# Altium PCB SmartHaloDD.PcbDoc (part 1 of 2)
Units mil, origin at the board's own origin, x right, y up, seen from the top; angles counter-clockwise.
Board outline 2460.63 x 2460.63 mil, 2 copper layers (Top Layer, Bottom Layer), stack 62.8 mil thick; 142 components, 107 nets, 460 pads, 151 vias.
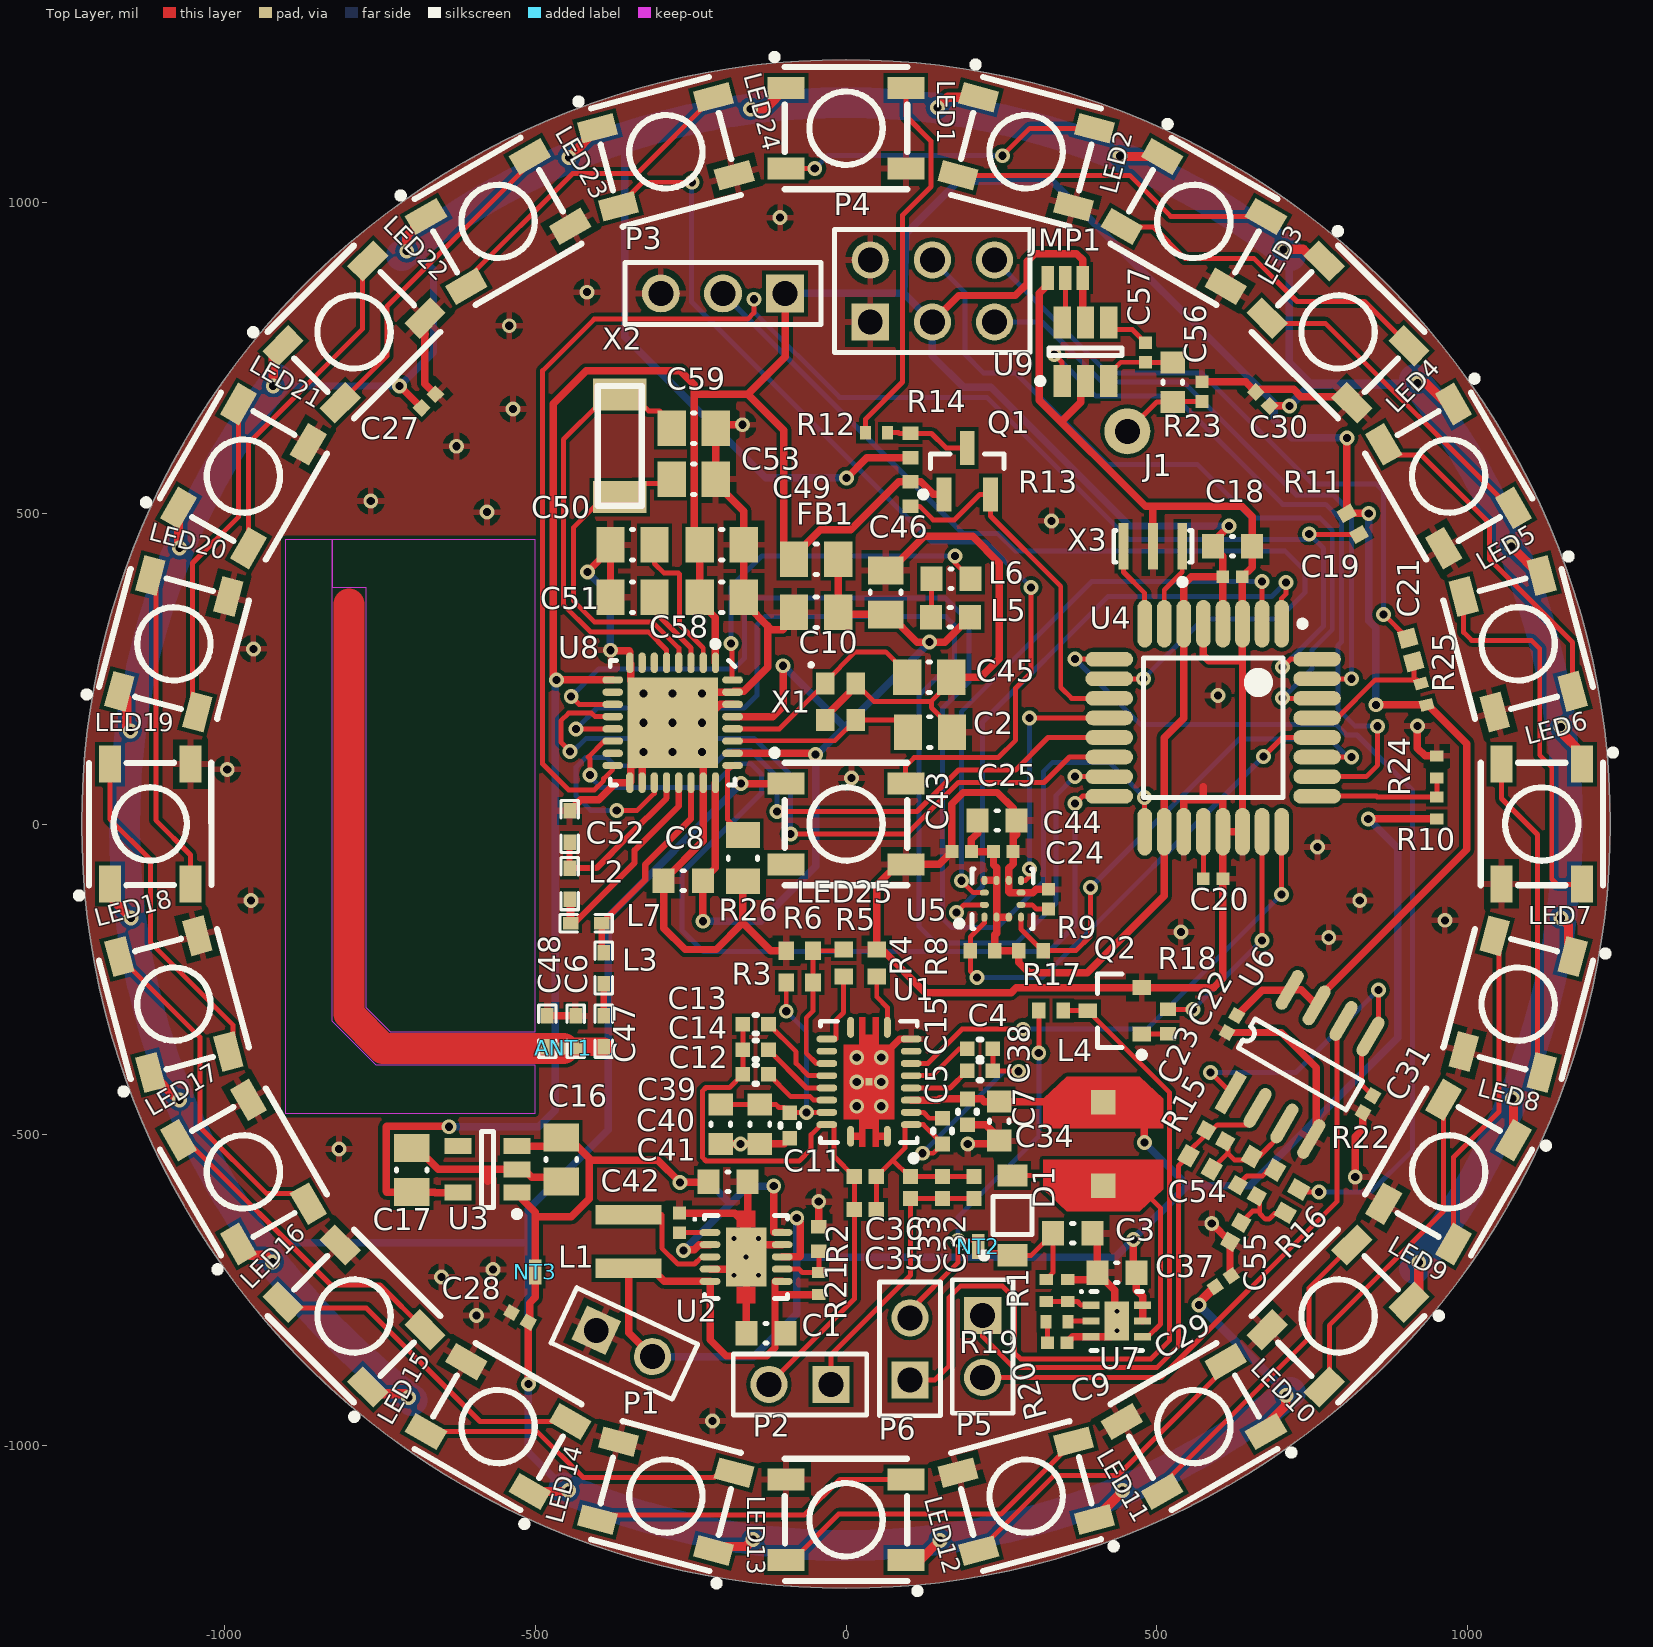
[diagram p0: Top Layer view]
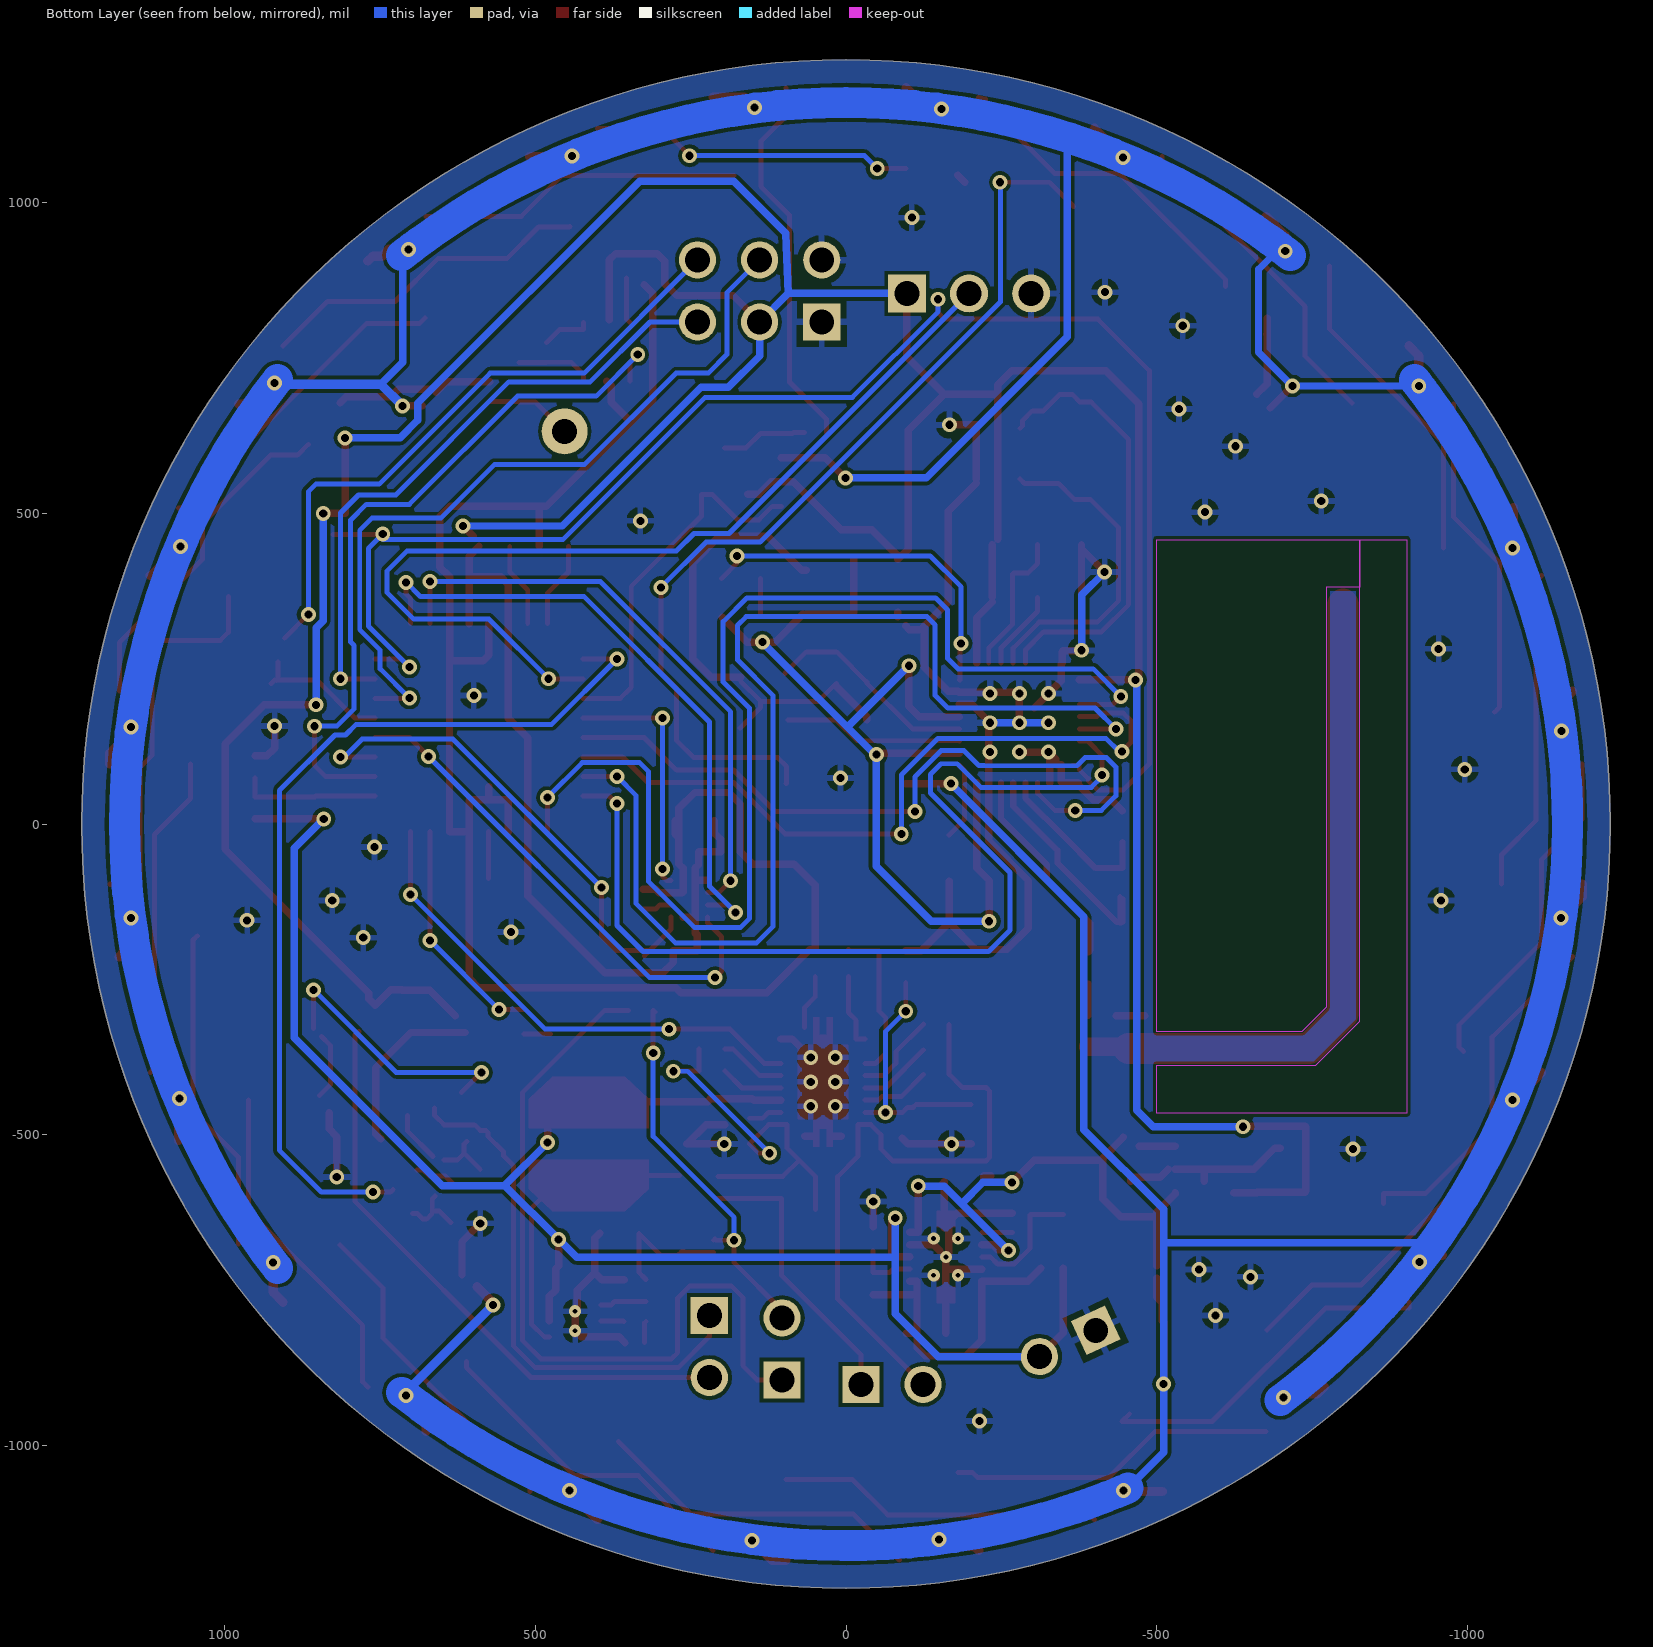
[diagram p1: Bottom Layer view, seen from below]

## Layer stack, top to bottom
Top Solder: solder mask 1, Solder Resist, Dk 3.5
Top Layer: signal copper 1.4
Dielectric 1: core 60, FR-4, Dk 4.2
Bottom Layer: signal copper 1.4
Bottom Solder: solder mask 1, Solder Resist, Dk 3.5

## Board outline
0,-1230.32 cw(c0,0) -1230.32,0 cw(c0,0) 0,1230.32 cw(c0,0) 1230.32,0 cw(c0,0)

## Design rules (kind name [scope] priority, off if disabled: settings)
AssemblyTestPointUsage AssemblyTestPointUsage_1 [All] p2:
AssemblyTestpoint AssemblyTestpoint_1 [All] p2: testpointundercomponent=TRUE minsize=40 maxsize=100 preferedsize=60 minholesize=0 maxholesize=40 preferedholesize=32 testpointgrid=1 usegrid=TRUE gridtolerance=0.01 allowsidetop=TRUE allowsidebottom=TRUE
Clearance [All] p1: gap=10
Clearance Clearance_ANT [InNet('NetANT1_1') vs OnLayer('Keep-Out Layer')] p2: gap=0 // Clearance Antenna (Keepout shouldn't apply to the antenna itself)
Clearance Clearance_1 [All] p3: gap=6
ComponentClearance ComponentClearance_1 [All] p2: gap=10 collisioncheckmode=3 verticalgap=10 showdistances=FALSE
DiffPairsRouting [All] p1: maxlimit=10 minlimit=10 mostfreqgap=10 toplayer_minwidth=15 toplayer_maxwidth=15 toplayer_prefwidth=15 bottomlayer_minwidth=15 bottomlayer_maxwidth=15 bottomlayer_prefwidth=15 maxuncoupledlength=500
DiffPairsRouting DiffPairsRouting_1 [All] p2: maxlimit=20 minlimit=6 mostfreqgap=8 toplayer_minwidth=6 toplayer_maxwidth=20 toplayer_prefwidth=8 bottomlayer_minwidth=6 bottomlayer_maxwidth=20 bottomlayer_prefwidth=8 maxuncoupledlength=500
FabricationTestPointUsage FabricationTestPointUsage_1 [All] p2: valid=0 allowmultiple=FALSE
FabricationTestpoint FabricationTestpoint_1 [All] p2: side=3 testpointundercomponent=TRUE minsize=40 maxsize=100 preferedsize=60 minholesize=0 maxholesize=40 preferedholesize=32 testpointgrid=1 allowsidetop=TRUE allowsidebottom=TRUE usegrid=TRUE gridtolerance=0.01
FanoutControl Fanout_LCC [IsLCC] p1: bgadir=Out bgaviamode=Centered fanoutstyle=Auto fanoutdirection=Alternating viagrid=1 // Fanout_LCC (Default Rule)
FanoutControl Fanout_BGA [IsBGA] p2: bgadir=Out bgaviamode=Centered fanoutstyle=Auto fanoutdirection=Alternating viagrid=1 // Fanout_BGA (Default Rule)
FanoutControl Fanout_Small [(CompPinCount < 5)] p3: bgadir=Out bgaviamode=Centered fanoutstyle=Auto fanoutdirection=OutThenIn viagrid=1 // Fanout_Small (Default Rule)
FanoutControl Fanout_SOIC [IsSOIC] p4: bgadir=Out bgaviamode=Centered fanoutstyle=Auto fanoutdirection=Alternating viagrid=1 // Fanout_SOIC (Default Rule)
FanoutControl Fanout_BGA_1 [IsBGA] p6: bgadir=Out bgaviamode=Centered fanoutstyle=Auto fanoutdirection=Alternating viagrid=1 // Fanout_BGA (Default Rule)
FanoutControl Fanout_LCC_1 [IsLCC] p7: bgadir=Out bgaviamode=Centered fanoutstyle=Auto fanoutdirection=Alternating viagrid=1 // Fanout_LCC (Default Rule)
FanoutControl Fanout_SOIC_1 [IsSOIC] p8: bgadir=Out bgaviamode=Centered fanoutstyle=Auto fanoutdirection=Alternating viagrid=1 // Fanout_SOIC (Default Rule)
FanoutControl Fanout_Small_1 [(CompPinCount < 5)] p9: bgadir=Out bgaviamode=Centered fanoutstyle=Auto fanoutdirection=OutThenIn viagrid=1 // Fanout_Small (Default Rule)
FanoutControl Fanout_Default_1 [All] p10: bgadir=Out bgaviamode=Centered fanoutstyle=Auto fanoutdirection=Alternating viagrid=1 // Fanout_Default (Default Rule)
Height Height_1 [All] p2: minheight=0 maxheight=118.11 prefheight=118.11
HoleSize HoleSize_1 [All] p2: absolutevalues=TRUE maxlimit=100 minlimit=1 maxpercent=80.000 minpercent=20.000
HoleToHoleClearance HoleToHoleClearance_1 [All] p2: gap=10 allowstackedmicrovias=TRUE
LayerPairs LayerPairs_1 [All] p2: enforce=TRUE
MinimumSolderMaskSliver MinimumSolderMaskSliver_1 [All] p2: minsoldermaskwidth=10
NetAntennae NetAntennae_1 [All] p2: netantennaetolerance=0
PasteMaskExpansion PasteMaskExpansion_1 [All] p2: expansion=0
PlaneClearance PlaneClearance_1 [All] p2: clearance=20
PlaneConnect PlaneConnect_1 [All] p2: planeconnectstyle=Relief reliefexpansion=20 reliefentries=4 reliefconductorwidth=10 reliefairgap=10
PolygonConnect [All] p1: connectstyle=Relief reliefconductorwidth=10 reliefentries=4 polygonreliefangle="90 Angle" airgapwidth=10
PolygonConnect PolygonConnect_1 [All] p2: connectstyle=Relief reliefconductorwidth=10 reliefentries=4 polygonreliefangle="90 Angle" airgapwidth=10
RoutingCorners RoutingCorners_1 [All] p2: cornerstyle=45-Degree minsetback=100 maxsetback=100
RoutingLayers RoutingLayers_1 [All] p2: top layer_v5=TRUE bottom layer_v5=TRUE
RoutingPriority RoutingPriority_1 [All] p2: routingpriority=0
RoutingTopology RoutingTopology_1 [All] p2: topology=Shortest
RoutingVias [All] p1: holewidth=28 width=50 viastyle="Through Hole" minholewidth=28 minwidth=50 maxholewidth=28 maxwidth=50
RoutingVias RoutingVias_1 [All] p2: holewidth=13 width=24 viastyle="Through Hole" minholewidth=13 minwidth=24 maxholewidth=28 maxwidth=50
ShortCircuit ShortCircuit_1 [All] p2: allowed=FALSE
SilkToBoardRegionClearance SilkToBoardRegionClearance_1 [All] p2:
SilkToSilkClearance SilkToSilkClearance_1 [All] p2: silktosilkclearance=10
SilkToSolderMaskClearance SilkToSolderMaskClearance_1 [IsPad] p2: minsilkscreentomaskgap=10 clearancetoexposedcopper=TRUE
SolderMaskExpansion [All] p1: expansion=4
SolderMaskExpansion SolderMaskExpansion_1 [All] p2: expansion=4
UnRoutedNet UnRoutedNet_1 [All] p2:
UnpouredPolygon UnpouredPolygon_1 [All] p2:
Width [All] p1: maxlimit=10 minlimit=10 preferedwidth=10
Width Width_ANT [InNet('NetANT1_1')] p2 off: maxlimit=20 minlimit=12 preferedwidth=15 impedancedriven=TRUE minimp=50.000000 maximp=50.000000 favimp=50.000000
Width Width_ANT1 [InNet('ANT1')] p3 off: maxlimit=20 minlimit=12 preferedwidth=15 impedancedriven=TRUE minimp=50.000000 maximp=50.000000 favimp=50.000000
Width Width_ANT2 [InNet('ANT2')] p4 off: maxlimit=20 minlimit=12 preferedwidth=15 impedancedriven=TRUE minimp=50.000000 maximp=50.000000 favimp=50.000000
Width Width_NetC47_2 [InNet('NetC47_2')] p5 off: maxlimit=20 minlimit=12 preferedwidth=15 impedancedriven=TRUE minimp=50.000000 maximp=50.000000 favimp=50.000000
Width Width_VBAT [InNet('VBAT')] p6: maxlimit=20 minlimit=8 preferedwidth=12
Width Width_VLED [InNet('VLED')] p7: maxlimit=50 minlimit=8 preferedwidth=12
Width Width_5V [InNet('+5')] p8: maxlimit=20 minlimit=8 preferedwidth=12
Width Width_AVDD [InNet('AVDD')] p9: maxlimit=20 minlimit=8 preferedwidth=12
Width Width_3.3V [InNet('+3.3')] p10: maxlimit=20 minlimit=8 preferedwidth=12
Width Width_VBZ [InNet('VBZ')] p11: maxlimit=20 minlimit=8 preferedwidth=12
Width Width_GND [InNet('GND')] p12: maxlimit=20 minlimit=8 preferedwidth=12
Width Width_1 [All] p13: maxlimit=75 minlimit=6 preferedwidth=8
25 further rules are at their usual default settings.

## Classes and differential pairs
component class PWR: C1 C3 C4 C5 C7 C9 C11 C12 C13 C14 C15 C16 C17 C32 C33 C34 C35 C36 C37 C38 C39 C40 C41 C42 D1 L1 L4 NT3 P1 P2 R1 R2 R3 R4 R5 R6 R19 R20 R21 U1 U2 U3 U7
component class MCU: C18 C19 C20 C21 C24 C25 C43 C44 C56 C57 J1 JMP1 P3 P4 Q1 R8 R9 R10 R11 R13 R14 R23 R24 R25 U4 U5 U9 X3
component class LED: C27 C28 C29 C30 LED1 LED2 LED3 LED4 LED5 LED6 LED7 LED8 LED9 LED10 LED11 LED12 LED13 LED14 LED15 LED16 LED17 LED18 LED19 LED20 LED21 LED22 LED23 LED24 LED25 R12
component class BLE: ANT1 C2 C6 C8 C10 C45 C46 C47 C48 C49 C50 C51 C52 C53 C58 C59 FB1 L2 L3 L5 L6 L7 R26 U8 X1 X2
component class ALARM: C22 C23 C31 C54 C55 NT2 P5 P6 Q2 R15 R16 R17 R18 R22 U6
differential pair XL: +XL_P -XL_N
differential pair XC: +XC_P -XC_N
differential pair SP_OUT: +SP_OUT_P -SP_OUT_N
differential pair OSC: +OSC_P -OSC_N
differential pair BZ_OUT: +BZ_OUT_P -BZ_OUT_N
differential pair ANT: +ANT_P -ANT_N
differential pair AC: +AC_P -AC_N

## Components (designator, comment, footprint, x,y, rotation, side; value= is the part's Value field where it differs from the comment)
ANT1 "Antenna" ANTENNA_PCB_2.4GHZ -454.89,-361.23 r90 top
C1 "CAP 10uF 10V 0603(1608)" CAPC0603(1608)100_N -128.81,-819.82 r0 top
C2 "15pF" CAPC0805(2012)100_N 135,148 r180 top
C3 "CAP 4.7uF 10V 0603(1608)" CAPC0603(1608)100_N 365,-659 r180 top
C4 "CAP 0.22uF 25V 0402(1005)" CAPC1005 215.63,-361.92 r180 top
C5 "CAP 0.1uF 16V 0402 (1005)" CAPC1005 195.45,-463.29 r270 top
C6 "1.2pF" 0402S -435.33,-358.51 r90 top
C7 "CAP 0.01uF 25V 0402 (1005)" CAPC1005 155.45,-494.29 r90 top
C8 "1.0nF" CAPC0603(1608)100_N -262,-91 r180 top
C9 "CAP 680pF 10V 0402(1005)" CAPC0402(1005)60_L 340,-835 r180 top
C10 "100nF" CAPC0805(2012)100_N -48,341 r0 top
C11 "CAP 0.1uF 25V 0402 (1005)" CAPC1005 -90.55,-485.29 r270 top
C12 "CAP 0.01uF 25V 0402 (1005)" CAPC1005 -145.41,-402.95 r0 top
C13 "CAP 22 nF 25V 0402 (1005" CAPC1005 -145.47,-322.28 r0 top
C14 "CAP 0.47uF 25V X7R 0402 (1005)" CAPC1005 -145.47,-363.62 r0 top
C15 "CAP 0.47uF 25V 0402 (1005)" CAPC1005 215.63,-397.35 r180 top
C16 "CAP 10uF 10V 0805(2012)" CAPC0805(2012)145_N -458,-540 r90 top
C17 "CAP 10uF 10V 0805(2012)" CAPC0805(2012)145_N -699,-557 r270 top
C18 "CAP 4.7uF 10V 0603(1608)" CAPC0603(1608)55_N 622.22,446.99 r180 top
C19 "CAP 100nF 10V 0402(1005)" CAPC0402(1005)60_L 622.22,397.78 r180 top
C20 "CAP 100nF 10V 0402(1005)" CAPC0402(1005)60_L 591,-88 r180 top
C21 "CAP 100nF 6.3V 0402(1005)" CAPC0402(1005)60_M 909,280 r105 top
C22 "CAP 1uF 6.3V 0402(1005)" CAPC0402(1005)60_L 621,-322 r60 top
C23 "CAP 1800pF 6.3V 0402(1005)" CAPC0402(1005)60_N 595,-502 r150 top
C24 "CAP 100nF 10V 0402(1005)" CAPC0402(1005)60_L 326,-121 r90 top
C25 "CAP 10uF 10V 0603(1608)" CAPC0603(1608)100_N 243.2,5.62 r180 top
C27 "CAP 100nF 10V 0402(1005)" CAPC0402(1005)60_L -671.94,680.78 r225 top
C28 "CAP 100nF 10V 0402(1005)" CAPC0402(1005)60_L -525,-794 r330 top
C29 "CAP 100nF 10V 0402(1005)" CAPC0402(1005)60_L 607,-736 r215 top
C30 "CAP 100nF 10V 0402(1005)" CAPC0402(1005)60_L 670.72,684.13 r315 top
C31 "CAP 1uF 6.3V 0402(1005)" CAPC0402(1005)60_L 840,-451 r60 top
C32 "CAP 0.22uF 25V 0402(1005)" CAPC0402(1005)60_N 155.08,-584.85 r90 top
C33 "CAP 0.01uF 25V 0402(1005)" CAPC0402(1005)60_N 103.9,-584.85 r90 top
C34 "CAP 6800pF 25V 0402(1005)" CAPC0402(1005)60_N 206.26,-584.85 r90 top
C35 "CAP 1200pF 25V 0402(1005)" CAPC0402(1005)60_N 31.1,-620.75 r0 top
C36 "CAP 1200pF 25V 0402(1005)" CAPC0402(1005)60_N 31.1,-567.6 r0 top
C37 "CAP 4.7uF 10V 0603(1608)" CAPC0603(1608)100_N 436,-722 r0 top
C38 "CAP 1.0uF 10V 0603(1608)" CAPC0603(1608)100_N 246.45,-478.29 r90 top
C39 "CAP 10uF 25V 0603(1608)" CAPC0603(1608)100_N -138.55,-483.29 r90 top
C40 "CAP 10uF 25V 0603(1608)" CAPC0603(1608)100_N -201.55,-483.29 r90 top
C41 "CAP 10uF 10V 0603(1608)" CAPC0603(1608)100_N -190,-576 r180 top
C42 "CAP 100nF 10V 0402(1005)" CAPC0402(1005)60_L -268,-642 r270 top
C43 "CAP 100nF 10V 0402(1005)" CAPC0402(1005)60_L 186.2,-44.38 r180 top
C44 "CAP 100nF 10V 0402(1005)" CAPC0402(1005)60_L 253.2,-44.38 r180 top
C45 "15pF" CAPC0805(2012)100_N 134,236 r180 top
C46 "1µF" CAPC0805(2012)100_N 63.72,372.77 r270 top
C47 "1.8pF" 0402S -390.05,-358.51 r90 top
C48 "1.5pF" 0402S -480.61,-358.51 r90 top
C49 "10µF" CAPC0805(2012)100_N -199.94,449.57 r180 top
C50 "100nF" CAPC0805(2012)100_N -343.64,449.57 r0 top
C51 "33nF" CAPC0805(2012)100_N -343.64,364.92 r0 top
C52 "2.2nF" 0402S -445,21 r270 top
C53 "15pF" CAPC0805(2012)100_N -245,555 r180 top
C54 "CAP 220nF 6.3V 0402(1005)" CAPC0402(1005)60_N 646,-590 r150 top
C55 "CAP 10nF 6.3V 0402(1005)" CAPC0402(1005)60_N 627,-657 r60 top
C56 "CAP 100nF 10V 0402(1005)" CAPC0402(1005)60_L 573,696 r270 top
C57 "CAP 100nF 10V 0402(1005)" CAPC0402(1005)60_L 482,759 r270 top
C58 "100nF" CAPC0805(2012)100_N -199.94,364.92 r180 top
C59 "15pF" CAPC0805(2012)100_N -245,637 r180 top
D1 "MBR0540T1G" ONSC-SOD-123-2-425-04_V 268,-630 r90 top
FB1 "MMZ1608B121C" CAPC0805(2012)100_N -48,426 r0 top
J1 "HEADERPIN" HEADERPIN 453,632 r0 top
JMP1 "JUMPER" JUMPER_SMT 353,879 r180 top
L1 "NR3015T2R2M" TAYO-IND0315_V -350,-672 r90 top
L2 "5.6nH" 0402S -445,-71 r270 top
L3 "3.9nH" 0402S -390.05,-206.94 r270 top
L4 "VLCF5020T" VLCF5020T-100M1R1-1 414,-515 r0 top
L5 "15nH" CAPC0603(1608)100_N 168,333 r0 top
L6 "10µH" CAPC0603(1608)100_N 169,395 r180 top
L7 "8.2nH" 0402S -443.2,-159.69 r0 top
LED1 "WS2812B" WS2812B5050 0,1120 r0 top locked
LED2 "WS2812B" WS2812B5050 290,1082 r345.01 top locked
LED3 "WS2812B" WS2812B5050 560,970 r330.02 top locked
LED4 "WS2812B" WS2812B5050 792,792 r315.01 top locked
LED5 "WS2812B" WS2812B5050 970,560 r300.02 top locked
LED6 "WS2812B" WS2812B5050 1082,290 r285.01 top locked
LED7 "WS2812B" WS2812B5050 1120,0 r270 top locked
LED8 "WS2812B" WS2812B5050 1082,-289.88 r255.02 top locked
LED9 "WS2812B" WS2812B5050 970,-560 r240 top locked
LED10 "WS2812B" WS2812B5050 792,-791.96 r225.02 top locked
LED11 "WS2812B" WS2812B5050 560,-969.95 r210.01 top locked
LED12 "WS2812B" WS2812B5050 290,-1081.84 r195.02 top locked
LED13 "WS2812B" WS2812B5050 0,-1120 r180.01 top locked
LED14 "WS2812B" WS2812B5050 -289.88,-1081.84 r165.02 top locked
LED15 "WS2812B" WS2812B5050 -560,-969.95 r150.01 top locked
LED16 "WS2812B" WS2812B5050 -791.96,-791.96 r135 top locked
LED17 "WS2812B" WS2812B5050 -969.95,-560 r120.02 top locked
LED18 "WS2812B" WS2812B5050 -1081.84,-289.88 r105 top locked
LED19 "WS2812B" WS2812B5050 -1120,0 r90.02 top locked
LED20 "WS2812B" WS2812B5050 -1081.84,290 r75.01 top locked
LED21 "WS2812B" WS2812B5050 -969.95,560 r60.02 top locked
LED22 "WS2812B" WS2812B5050 -791.96,792 r45.01 top locked
LED23 "WS2812B" WS2812B5050 -560,970 r30.02 top locked
LED24 "WS2812B" WS2812B5050 -289.88,1082 r15.01 top locked
LED25 "WS2812B" WS2812B5050 0,0 r0 top locked
NT2 "NetTiePWR" NETTIEPWR 223,-700 r90 top net-tie
NT3 "NetTiePWR" NETTIEPWR -510,-701 r270 top net-tie
P1 "MTLW-102-05-G-S-172" SMTC-MTLW-102-05-X-S-172 -402,-815 r335 top locked
P2 "MTLW-102-05-G-S-172" SMTC-MTLW-102-05-X-S-172 -24,-902 r180 top locked
P3 "TSW-103-07-F-S" SMTC-TSW-103-07-X-S -98,854 r180 top locked
P4 "MTLW-103-06-G-D-180" SMTC-MTLW-103-06-X-D-180 39,808 r0 top locked
P5 "MTLW-102-05-G-S-172" SMTC-MTLW-102-05-X-S-172 220,-791 r270 top
P6 "MTLW-102-05-G-S-172" SMTC-MTLW-102-05-X-S-172 103,-895 r90 top
Q1 "BSS138AKAR" NXP-SOT23_N 195.21,567.98 r90 top
Q2 "MMBT3904" INF-SOT23_L 432.64,-300.64 r180 top
R1 "510k ±1% 0402(1005)" RESC0402(1005)_L 322,-751 r90 top
R2 "249K ±1% 0402(1005)" RESC0402(1005)_N -43.81,-667.82 r90 top
R3 "1R6 ±5% 0402(1005)" RESC0402(1005)_M -74.52,-255.18 r180 top
R4 "2k4 ±5% 0402(1005)" RESC0402(1005)_M 49.5,-223.69 r270 top
R5 "430R ±5% 0402(1005)" RESC0402(1005)_M -3.65,-223.69 r90 top
R6 "200R ±5% 0402(1005)" RESC0402(1005)_M -74.52,-204 r0 top
R8 "4K7 ±1% 0402(1005)" RESC0402(1005)_N 220,-204 r0 top
R9 "4K7 ±1% 0402(1005)" RESC0402(1005)_N 298,-204 r180 top
R10 "100K ±5% 0402(1005)" RESC0402(1005)_L 951,26 r270 top
R11 "10K ±5% 0402(1005)" RESC0402(1005)_N 816,483 r120 top
R12 "100R ±5% 0402(1005)" RESC0402(1005)_L 49,630 r180 top
R13 "10K ±1% 0402(1005)" RESC0402(1005)_N 104,531 r90 top
R14 "10K 1% 0402(1005)" RESC0402(1005)_N 104,609 r270 top
R15 "20K 5% 0402(1005)" RESC0402(1005)_M 570,-545 r150 top
R16 "3K3 5% 0402(1005)" RESC0402(1005)_M 718,-607 r60 top
R17 "1K2 ±5% 0402(1005)" RESC0402(1005)_N 330,-300 r180 top
R18 "1K2 5% 0402(1005)" RESC0402(1005)_N 518,-318 r270 top
R19 "33k ±1% 0402(1005)" RESC0402(1005)_L 357,-751 r270 top
R20 "10k ±1% 0402(1005)" RESC0402(1005)_L 340,-801 r0 top
R21 "2M74 ±1% 0402(1005)" RESC0402(1005)_L -43.81,-739.82 r270 top
R22 "20K 5% 0402(1005)" RESC0402(1005)_M 672,-546 r150 top
R23 "2K ±5% 0603(1608)" RESC0603(1608)_N 526,711 r270 top
R24 "300K ±5% 0402(1005)" RESC0402(1005)_L 951,92 r270 top
R25 "1K ±5% 0402(1005)" RESC0402(1005)_L 930,209 r285 top
R26 "22k" RESC0805(2012)_N -166,-55 r270 top
U1 "bq51050B" RHL20-3050X2050TP 37,-415 r180 top
U2 "TPS61202DRCR" DRC10-2400X1650TP -160.81,-696.82 r0 top
U3 "MIC5225-3.3YM5" SOT23-5_N -577,-556 r180 top
U4 "ATmega328P-AU" 32A_M 591,155 r270 top
U5 "LSM303CTR" LGA12-2X2X1_N 252.2,-120.38 r90 top
U6 "IS31AP4991-GRLS2-TR" SOP8 619,-432 r60 top
U7 "TPS61170DRVR" DRV6-1600X1000TP 436,-800 r0 top
U8 "nRF8001" NORDIC_QFN50P500X500X90-33N -279,163 r270 top
U9 "AT42QT1010-TSHR" 6ST1_M 385.46,760.19 r90 top
X1 "16MHz" CRYSTAL_16MHZ_SMT4 -9,197 r270 top
X2 "32.768kHz" CRYSTAL_32.768KHZ_SMT2 -364.1,608.8 r90 top
X3 "Cap" CSTCE10M0G55-R0 494,447 r180 top

## Footprints (in the part's own frame and the unit in brackets; to place one, negate y for a bottom-side part, rotate by r counter-clockwise, add the part's x,y. Pads: shape width x height; smd on the part's side, far side on the other; paste and mask are expansions set on the pad)
6ST1_M [mm] "SOT23, 6-Leads, Body 2.9x1.6mm, Pitch 0.95mm, Lead Span 2.8mm, IPC Low Density"
  rect 1.3x0.7 smd: 1(-1.2,0.95) 2(-1.2,0) 3(-1.2,-0.95) 4(1.2,-0.95) 5(1.2,0) 6(1.2,0.95)
  silkscreen extent -1.32,-1.5 0.15,1.97, body extent -0.87,-1.5 0.87,1.5, height 1.45
32A_M [mm] "Thin QFP, 32-Leads, Body 7x7mm, Pitch 0.8mm, IPC Low Density"
  oval 1.95x0.6 smd mask+0.051: 1(-4.25,2.8) 2(-4.25,2) 3(-4.25,1.2) 4(-4.25,0.4) 5(-4.25,-0.4) 6(-4.25,-1.2) 7(-4.25,-2) 8(-4.25,-2.8) 17(4.25,-2.8) 18(4.25,-2) 19(4.25,-1.2) 20(4.25,-0.4) 21(4.25,0.4) 22(4.25,1.2) 23(4.25,2) 24(4.25,2.8)
  oval 0.6x1.95 smd mask+0.051: 9(-2.8,-4.25) 10(-2,-4.25) 11(-1.2,-4.25) 12(-0.4,-4.25) 13(0.4,-4.25) 14(1.2,-4.25) 15(2,-4.25) 16(2.8,-4.25) 25(2.8,4.25) 26(2,4.25) 27(1.2,4.25) 28(0.4,4.25) 29(-0.4,4.25) 30(-1.2,4.25) 31(-2,4.25) 32(-2.8,4.25)
  silkscreen extent -4.37,-2.85 2.85,3.78, body extent -3.5,-3.5 3.5,3.5, height 1.2
0402S [mil]
  rect 25x20 smd: 1(0,0) 2(50,0)
  silkscreen extent -17,-14 67,14, body extent 3,-12 47,12, height 28
ANTENNA_PCB_2.4GHZ [mm] "ANT_PCB_2.4GHZ_NRF51422_1.6MM_1OZ"
  rect 0.5x0.5 smd paste-1.27: 1(0,0)
  Top Layer lines w1.27: 18.16,8.77 1.4,8.77 0,7.37 0,0
  Keep-Out Layer region: -2.635,1.143 -0.686,1.143 -0.686,7.645 1.118,9.456 20.803,9.456 20.803,11.365 20.789,11.379 -2.642,11.379 -2.642,1.15
  Keep-Out Layer region: 0.686,1.143 20.795,1.143 20.795,9.456 18.847,9.456 18.847,8.084 1.676,8.084 0.686,7.087
  body extent -0.69,1.14 18.8,9.41, height 0.04
CAPC0402(1005)60_L [mm] "Chip Capacitor, Body 1.0x0.5mm, Height 0.6mm, IPC High Density"
  rect 0.52x0.52 smd: 1(-0.4,0) 2(0.4,0)
  body extent -0.55,-0.3 0.55,0.3, height 0.6
CAPC0402(1005)60_M [mm] "Chip Capacitor, Body 1.0x0.5mm, Height 0.6mm, IPC Low Density"
  rect 0.72x0.72 smd: 1(-0.5,0) 2(0.5,0)
  body extent -0.55,-0.3 0.55,0.3, height 0.6
CAPC0402(1005)60_N [mm] "Chip Capacitor, Body 1.0x0.5mm, Height 0.6mm, IPC Medium Density"
  rect 0.62x0.62 smd: 1(-0.45,0) 2(0.45,0)
  body extent -0.55,-0.3 0.55,0.3, height 0.6
CAPC0603(1608)55_N [mm] "Chip Capacitor, Body 1.6x0.8mm, Height 0.55mm, IPC Medium Density"
  rect 0.9x1 smd: 1(-0.8,0) 2(0.8,0)
  silkscreen extent -0.05,-0.4 0.05,0.4, body extent -0.87,-0.48 0.88,0.47, height 0.55
CAPC0603(1608)100_N [mm] "Chip Capacitor, Body 1.6x0.8mm, Height 1.0mm, IPC Medium Density"
  rect 0.9x1 smd: 1(-0.8,0) 2(0.8,0)
  silkscreen extent -0.05,-0.4 0.05,0.4, body extent -0.87,-0.48 0.88,0.47, height 1
CAPC0805(2012)100_N [mm] "Chip Capacitor, Body 2.0x1.2mm, Height 1.0mm, IPC Medium Density"
  rect 1.15x1.45 smd: 1(-0.9,0) 2(0.9,0)
  silkscreen extent -0.05,-0.62 0.05,0.63, body extent -1.1,-0.72 1.1,0.73, height 1
CAPC0805(2012)145_N [mm] "Chip Capacitor, Body 2.0x1.2mm, Height 1.45mm, IPC Medium Density"
  rect 1.15x1.45 smd: 1(-0.9,0) 2(0.9,0)
  silkscreen extent -0.05,-0.63 0.05,0.62, body extent -1.1,-0.72 1.1,0.73, height 1.45
CAPC1005 [mm] "Chip Capacitor 1005"
  rect 0.6x0.6 smd: 1(-0.525,0) 2(0.525,0)
  silkscreen extent -0.05,-0.38 0.05,0.38, body extent -0.57,-0.3 0.57,0.3, height 0.2
CRYSTAL_16MHZ_SMT4 [mm] "CRYSTAL 2.5 x 2.0 mm, 4 Pads, 1.5 mm Horizontal Pitch, 1.25 mm Vertical Pitch"
  rect 0.9x0.75 smd: 1(-0.75,-0.625) 2(0.75,-0.625) 3(0.75,0.625) 4(-0.75,0.625)
  silkscreen extent -1.53,-1.23 -1.47,-1.17, body extent -1.25,-1 1.25,1, height 0.75
CRYSTAL_32.768KHZ_SMT2 [mm] "CRYSTAL 32.768kHz, 4.9 x 1.8 x 0.80 mm, 4.2 mm Pitch"
  rect 1.3x2.2 smd: 1(-2.1,0) 2(2.1,0)
  silkscreen extent -2.45,-0.9 2.45,0.9, body extent -2.45,-0.9 2.45,0.9, height 0.8
CSTCE10M0G55-R0 [mm] "SMD, 3-Leads, Body 3.2x1.3mm, Pitch 1.2mm"
  rect 0.4x1.9 smd: 1(-1.2,0) 2(0,0) 3(1.2,0)
  silkscreen extent -1.6,-0.65 1.6,1.58, body extent -1.6,-0.65 1.6,0.65, height 1
DRC10-2400X1650TP [mm] "SON, 10-Leads, Body 3x3mm, Pitch 0.5mm, Thermal Pad 2.4x1.65mm, TI Recommended"
  oval 0.85x0.28 smd paste-0.025 mask+0.07: 1(-1.475,1) 2(-1.475,0.5) 3(-1.475,0) 4(-1.475,-0.5) 5(-1.475,-1) 6(1.475,-1) 7(1.475,-0.5) 8(1.475,0) 9(1.475,0.5) 10(1.475,1)
  rect 1.65x2.4 smd paste-0.825 mask+0.07: 11(0,0)
  Top Layer region: -0.39,-1.9 -0.11,-1.9 -0.11,-1.2 -0.39,-1.2
  Top Layer region: 0.39,-1.2 0.11,-1.2 0.11,-1.9 0.39,-1.9
  Top Layer region: 0.39,1.9 0.11,1.9 0.11,1.2 0.39,1.2
  Top Layer region: -0.39,1.2 -0.11,1.2 -0.11,1.9 -0.39,1.9
  silkscreen extent -2.15,-1.7 1.7,1.7, body extent -1.55,-1.55 1.55,1.55, height 1
DRV6-1600X1000TP [mm] "SON, 6-Leads, Body 2x2mm, Pitch 0.65mm, Thermal Pad 1.6x1mm, TI Recommended"
  rect 0.7x0.3 smd paste-0.025 mask+0.07: 1(-1.05,0.65) 2(-1.05,0) 3(-1.05,-0.65) 4(1.05,-0.65) 5(1.05,0) 6(1.05,0.65)
  rect 1x1.6 smd paste-0.5 mask+0.07: 7(0,0)
  silkscreen extent -1.5,-1.2 1.05,1.25, body extent -1.05,-1.05 1.05,1.05, height 0.8
HEADERPIN [mil] "HEADER PIN 40 mils hole"
  round 74 hole 40: 1(0,0)
INF-SOT23_L [mm] "SOT23, 3-Leads, Body 2.9x1.3 mm, Pitch 0.95 mm, IPC High Density"
  rect 0.75x0.6 smd: 1(-1.1,0.95) 2(-1.1,-0.95) 3(1.1,0)
  silkscreen extent -1.23,-1.5 0.7,1.92, body extent -0.7,-1.5 0.7,1.5, height 1.1
JUMPER_SMT [mil] "JUMPER SMT"
  rect 20x39 smd paste-20: 1(-28,0) 2(0,0) 3(28,0)
LGA12-2X2X1_N [mm] "PQFN, 12-Leads, Body 2x2mm, Pitch 0.5mm, IPC Medium Density"
  oval 0.375x0.25 smd mask+0: 1(-0.75,0.75) 2(-0.75,0.25) 3(-0.75,-0.25) 4(-0.75,-0.75) 7(0.75,-0.75) 8(0.75,-0.25) 9(0.75,0.25) 10(0.75,0.75)
  oval 0.25x0.375 smd mask+0: 5(-0.25,-0.75) 6(0.25,-0.75) 11(0.25,0.75) 12(-0.25,0.75)
  silkscreen extent -1.22,-1.25 1.22,1.9, body extent -1.14,-1.14 1.14,1.14, height 1
NETTIEPWR [mil] "NetTie for Power Nets"
  rect 20x20 smd paste-10 mask+0: 1(10,10) 2(30,10)
NORDIC_QFN50P500X500X90-33N [mm] "QFN, 32-Leads, Body 5.0x5.0mm, Pitch 0.5mm, Thermal Pad 3.6x3.6mm"
  oval 0.85x0.3 smd mask+0.076: 1(-2.45,1.75) 2(-2.45,1.25) 3(-2.45,0.75) 4(-2.45,0.25) 5(-2.45,-0.25) 6(-2.45,-0.75) 7(-2.45,-1.25) 8(-2.45,-1.75) 17(2.45,-1.75) 18(2.45,-1.25) 19(2.45,-0.75) 20(2.45,-0.25) 21(2.45,0.25) 22(2.45,0.75) 23(2.45,1.25) 24(2.45,1.75)
  oval 0.3x0.85 smd mask+0.076: 9(-1.75,-2.45) 10(-1.25,-2.45) 11(-0.75,-2.45) 12(-0.25,-2.45) 13(0.25,-2.45) 14(0.75,-2.45) 15(1.25,-2.45) 16(1.75,-2.45) 25(1.75,2.45) 26(1.25,2.45) 27(0.75,2.45) 28(0.25,2.45) 29(-0.25,2.45) 30(-0.75,2.45) 31(-1.25,2.45) 32(-1.75,2.45)
  rect 3.7x3.7 smd mask+0: 33(0,0)
  silkscreen extent -3.34,-2.55 2.55,2.55, body extent -2.5,-2.5 2.5,2.5, height 0.85
NXP-SOT23_N [mm] "SOT23, 3-Leads, Body 3x1.4mm, Pitch 0.95mm, IPC Medium Density"
  rect 1.4x0.6 smd: 1(-0.95,0.95) 2(-0.95,-0.95) 3(0.95,0)
  silkscreen extent -1.07,-1.5 0.7,1.92, body extent -0.7,-1.5 0.7,1.5, height 1.1
ONSC-SOD-123-2-425-04_V [mm] "SOD, 2-Leads, Body 2.69x1.6mm"
  rect 0.91x1.22 smd: 1(-1.635,0) 2(1.635,0)
  silkscreen extent -1.76,-0.8 0.78,1.28, body extent -1.35,-0.8 1.35,0.8, height 1.35
RESC0402(1005)_L [mm] "Chip Resistor, Body 1.0x0.5mm, IPC High Density"
  rect 0.45x0.55 smd: 1(-0.45,0) 2(0.45,0)
  body extent -0.52,-0.27 0.53,0.28, height 0.4
RESC0402(1005)_M [mm] "Chip Resistor, Body 1.0x0.5mm, IPC Low Density"
  rect 0.65x0.75 smd: 1(-0.55,0) 2(0.55,0)
  body extent -0.52,-0.28 0.53,0.28, height 0.4
RESC0402(1005)_N [mm] "Chip Resistor, Body 1.0x0.5mm, IPC Medium Density"
  rect 0.55x0.65 smd: 1(-0.5,0) 2(0.5,0)
  body extent -0.52,-0.27 0.53,0.28, height 0.4
RESC0603(1608)_N [mm] "Chip Resistor, Body 1.6x0.8mm, IPC Medium Density"
  rect 0.9x1 smd: 1(-0.8,0) 2(0.8,0)
  silkscreen extent -0.05,-0.4 0.05,0.4, body extent -0.85,-0.47 0.85,0.47, height 0.6
RESC0805(2012)_N [mm] "Chip Resistor, Body 2.0x1.3mm, IPC Medium Density"
  rect 1.05x1.4 smd: 1(-0.95,0) 2(0.95,0)
  silkscreen extent -0.05,-0.6 0.05,0.6, body extent -1.1,-0.67 1.1,0.68, height 0.7
RHL20-3050X2050TP [mm] "QFN, 20-Leads, Body 4.5x3.5mm, Pitch 0.5mm, Thermal Pad 3.05x2.05mm, TI Recommended"
  oval 0.28x0.85 smd paste-0.025 mask+0.07: 1(-0.75,2.225) 10(-0.75,-2.225) 11(0.75,-2.225) 20(0.75,2.225)
  oval 0.85x0.28 smd paste-0.025 mask+0.07: 2(-1.725,1.75) 3(-1.725,1.25) 4(-1.725,0.75) 5(-1.725,0.25) 6(-1.725,-0.25) 7(-1.725,-0.75) 8(-1.725,-1.25) 9(-1.725,-1.75) 12(1.725,-1.75) 13(1.725,-1.25) 14(1.725,-0.75) 15(1.725,-0.25) 16(1.725,0.25) 17(1.725,0.75) 18(1.725,1.25) 19(1.725,1.75)
  rect 0.3x0.3 smd paste-0.15 mask+0: 21(0,0)
  Top Layer region: 0.16,2.65 0.16,1.925 -0.16,1.925 -0.16,2.65 -0.39,2.65 -0.39,1.525 -1.025,1.525 -1.025,-1.525 -0.39,-1.525 -0.39,-2.65 -0.16,-2.65 -0.16,-1.925 0.16,-1.925 0.16,-2.65 0.39,-2.65 0.39,-1.525 1.025,-1.525 1.025,1.525 0.39,1.525 0.39,2.65
  silkscreen extent -1.97,-2.48 1.98,3.25, body extent -1.82,-2.33 1.83,2.32, height 1
SMTC-MTLW-102-05-X-S-172 [mm] "Terminal Assembly, 1x2 Pins, Vertical, 2.54mm Pitch, Male"
  rect 1.52x1.52 hole 1.02: 1(0,0)
  round 1.52 hole 1.02: 2(2.54,0)
  silkscreen extent -1.46,-1.24 4,1.24
SMTC-MTLW-103-06-X-D-180 [mm] "Terminal Assembly, 2x3 Pins, Vertical, 2.54mm Pitch, Male"
  rect 1.52x1.52 hole 1.02: 1(0,0)
  round 1.52 hole 1.02: 2(0,2.54) 3(2.54,0) 4(2.54,2.54) 5(5.08,0) 6(5.08,2.54)
  silkscreen extent -1.46,-1.24 6.54,3.78
SMTC-TSW-103-07-X-S [mm] ".025 SQ Post Terminal Strip Assembly, 1x3 Pins, Vertical, 2.54mm Pitch, Male"
  rect 1.55x1.55 hole 1.02: 1(0,0)
  round 1.55 hole 1.02: 2(2.54,0) 3(5.08,0)
  silkscreen extent -1.46,-1.27 6.54,1.27
SOP8 [mm]
  rect 1.8x0.506 smd: 1(0,0)
  oval 1.8x0.506 smd: 2(0,-1.27) 3(0,-2.54) 4(0,-3.81) 5(4.84,-3.81) 6(4.84,-2.54) 7(4.84,-1.27) 8(4.84,0)
  silkscreen extent 1.73,-4.44 3.11,0.63, body extent 0.45,-4.36 4.39,0.55, height 1.65
SOT23-5_N [mm] "SOT23, 5-Leads, Body 2.9x1.6mm, Pitch 0.95mm, Lead Span 2.8mm, IPC Medium Density"
  rect 1.1x0.65 smd: 1(-1.2,0.95) 2(-1.2,0) 3(-1.2,-0.95) 4(1.2,-0.95) 5(1.2,0.95)
  silkscreen extent -1.33,-1.55 0.25,1.95, body extent -0.9,-1.55 0.9,1.55, height 1.4
TAYO-IND0315_V [mm] "SMT Inductor, 2 Leads, Body 3x3 mm"
  rect 0.8x2.7 smd: 1(-1.1,0) 2(1.1,0)
  body extent -1.5,-1.5 1.5,1.5, height 1.5
VLCF5020T-100M1R1-1 [mm] "IND SMT, 5 x 5 x 2 mm"
  rect 1x1 smd paste+0 mask+0: 1(0,1.7) 2(0,-1.7)
  Top Layer region: 2.45,-0.65 2.45,-1.85 1.5,-2.75 -1.5,-2.75 -2.45,-1.85 -2.45,-0.65
  Top Layer region: -2.45,0.65 -2.45,1.85 -1.5,2.75 1.5,2.75 2.45,1.85 2.45,0.65
  body extent -2.5,-2.5 2.5,2.5, height 2
WS2812B5050 [mm] "WS RGB LED 5V SERIAL"
  rect 1.5x0.9 smd: 1(-2.45,1.65) 2(-2.45,-1.65) 3(2.45,-1.65) 4(2.45,1.65)
  silkscreen extent -3.04,-2.5 2.5,3.03, body extent -2.5,-2.5 2.5,2.5, height 1.59

## Part data
ANT1: library part ANTENNA_PCB_2.4GHz, "Antenna PCB, 2.4GHz, 26.11 mm x 1.27 mm, FR4 60 mils, Er = 4.2"
C1 C25 C41: library part CMP-1035-02799-1, "CAP 10uF 10V ±10% 0603 (1608 Metric)"
C2 C45 C53 C59: library part C0402-15p, "CAP 15pF *V ±5% NP0 0805 (2012 Metric)"
C3 C37: library part CMP-1035-02799-1, "CAP 4.7uF 10V ±10% 0603 (1608 Metric)"
C4: library part CMP-0001-00074-1, "CAP 0.22uF 25V ±10% 0402 (1005 Metric)"
C5: library part CMP-0001-00074-1, "CAP 0.1uF 16V ±10% 0402 (1005 Metric)"
C6: library part C0402-1.2p, "CAP 1.2pF *V ±5% NP0 0402 (1005 Metric)"
C7: library part CMP-0001-00074-1, "CAP 0.01uF 25V ±10% 0402 (1005 Metric)"
C8: library part C0402-1n0, "CAP 1.0nF *V ±10% X7R 0603 (1608 Metric)"
C9: library part CMP-1034-02064-1, "CAP 680pF 10V ±5% 0402 (1005 Metric)"
C10 C58: library part C0402-100n, "CAP 100nF *V ±10% X7R 0805 (2012 Metric)"
C11: library part CMP-0001-00074-1, "CAP 0.1uF 25V ±10% 0402 (1005 Metric)"
C12: library part CMP-0001-00074-1, "CAP 0.01uF 10V ±10% 0402 (1005 Metric)"
C13: library part CMP-0001-00074-1, "CAP 22 nF 25V ±10% 0402 (1005 Metric)"
C14: library part CMP-0001-00074-1, "CAP 0.47 uF 25V ±10% X7R 0402 (1005 Metric)"
C15: library part CMP-0001-00074-1, "CAP 0.47uF 25V ±10% 0402 (1005 Metric)"
C16 C17: library part CMP-1036-04922-1, "CAP 10uF 10V ±10% 0805 (2012 Metric)"
C18: library part CMP-1035-02784-1, "CAP 4.7uF 10V ±10% 0603 (1608 Metric)"
C19 C20 C24 C27 C28 C29 C30 C42 C43 C44 C56 C57: library part CMP-1034-02064-1, "CAP 100nF 10V ±5% 0402 (1005 Metric)"
C21: library part CMP-1034-02060-1, "CAP 100nF 6.3V ±5% 0402 (1005 Metric)"
C22 C31: library part CMP-1034-02113-1, "CAP 1uF 6.3V ±10% 0402 (1005 Metric)"
C23: library part CMP-1034-01350-1, "CAP 1800pF 6.3V ±10% 0402 (1005 Metric)"
C32: library part CMP-1034-00958-1, "CAP 0.22uF 25V ±10% 0402 (1005 Metric)"
C33: library part CMP-1034-00958-1, "CAP 0.01uF 25V ±10% 0402 (1005 Metric)"
C34: library part CMP-1034-00958-1, "CAP 6800pF 25V ±10% 0402 (1005 Metric)"
C35 C36: library part CMP-1034-00958-1, "CAP 1200pF 25V ±10% 0402 (1005 Metric)"
C38: library part CMP-1035-02799-1, "CAP 1.0uF 10V ±10% 0603 (1608 Metric)"
C39 C40: library part CMP-1035-02799-1, "CAP 10uF 25V ±10% 0603 (1608 Metric)"
C46: library part C0603-1µ0, "CAP 1.0uF 10V ±10% X7R 0805 (2012 Metric)"
C47: library part C0402-1.8p, "CAP 1.8pF *V ±0.1pF NP0 0402 (1005 Metric)"
C48: library part C0402-1.2p, "CAP 1.5pF *V ±5% NP0 0402 (1005 Metric)"
C49: library part C0603-1µ0, "CAP 10uF 10V ±10% X7R 0805 (2012 Metric)"
C50: library part C0402-100n, "CAP 100nF 10V ±10% X7R 0805 (2012 Metric)"
C51: library part C0402-33n, "CAP 33nF 10V ±10% X7R 0805 (2012 Metric)"
C52: library part C0402-2n2, "CAP 2.2nF *V ±10% X7R 0402 (1005 Metric)"
C54: library part CMP-1034-01350-1, "CAP 220nF 6.3V ±10% 0402 (1005 Metric)"
C55: library part CMP-1034-01350-1, "CAP 10nF 6.3V ±10% 0402 (1005 Metric)"
D1: library part CMP-1055-00401-1, "Schottky Power Rectifier, 2-Pin SOD-123, Pb-Free, Tape and Reel"
FB1: library part L0402-15n, "Ferrite bead 0805"
J1: "HEADER 0.025\" PIN"
L1: library part CMP-0569-00001-1, "SMD Power Inductor, 2.2 uH, +/-20%, 3 x 3 x 1.5 mm, -25 to 120 degC, Pb-Free, Tape and Reel"
L2: library part L0402-5n6, "IND 5.6nH 0402 (1005 Metric)"
L3: library part L0402-3n9, "IND 3.9nH 0402 (1005 Metric)"
L4: library part VLCF5020T-100M1R1-1, "FIXED IND 10UH 1.13A 237 MOHM"
L5: library part L0402-15n, "IND 15nH 0603 (1608 Metric)"
L6: library part L0603-10µ, "IND 10uH 0603 (1608 Metric)"
L7: library part L0402-8n2, "IND 8.2nH 0402 (1005 Metric)"
LED1 LED2 LED3 LED4 LED5 LED6 LED7 LED8 LED9 LED10 LED11 LED12 LED13 LED14 LED15 LED16 LED17 LED18 LED19 LED20 LED21 LED22 LED23 LED24 LED25: library part WS2812B5050, "IC RGB LED 5V SERIAL"
P1 P2 P5 P6: library part SMTC-MTLW-102-05-X-S-172, "Low Profile .025\" SQ Post Header, Through-hole, Vertical, -55 to 125 degC, 2.54 mm Pitch, 2-Pin, Male, RoHS"
P3: library part SMTC-TSW-103-X-X-S-X, "0.025\" SQ Post Header, Through-hole, Vertical, -55 to 125 degC, 2.54 mm Pitch, 3-Pin, Male, RoHS"
P4: library part SMTC-MTLW-103-06-X-D-180, "Low Profile .025\" SQ Post Header, Through-hole, Vertical, -55 to 125 degC, 2.54 mm Pitch, 6-Pin, Male, RoHS"
Q1: library part CMP-1258-00119-1, "Single N-Channel Trench MOSFET, 60 V, 0.2 A, -55 to 150 degC, 3-Pin SOT23, Tape and Reel"
Q2: library part CMP-1178-00008-1, "NPN Silicon Switching Transistor, 40 V VCEO, 200 mA IC, SOT23, Reel, Green"
R1: library part CMP-1011-00897-1, "510k 0.063W ±1% 0402 (1005 Metric)"
R2: library part CMP-1011-00779-1, "249K 0.063W ±1% 0402 (1005 Metric)"
R3: library part CMP-1011-00007-1, "1R6 0.063W ±5% 0402 (1005 Metric)"
R4: library part CMP-1011-00007-1, "2k4 0.063W ±5% 0402 (1005 Metric)"
R5: library part CMP-1011-00007-1, "430R 0.063W ±5% 0402 (1005 Metric)"
R6: library part CMP-1011-00007-1, "200R 0.063W ±5% 0402 (1005 Metric)"
R8 R9: library part CMP-1011-00586-1, "4K7 0.063W ±1% 0402 (1005 Metric)"
R10: library part CMP-1011-00074-1, "100K 0.063W ±5% 0402 (1005 Metric)"
R11: library part CMP-1011-00098-1, "10K 0.063W ±5% 0402 (1005 Metric)"
R12: library part CMP-1011-00050-1, "100R 0.063W ±5% 0402 (1005 Metric)"
R13 R14: library part CMP-1011-00623-1, "10K 0.063W ±1% 0402 (1005 Metric)"
R15 R22: library part CMP-1011-00105-1, "20K 0.063W ±5% 0402 (1005 Metric)"
R16: library part CMP-1011-00105-1, "3K3 0.063W ±5% 0402 (1005 Metric)  SMD"
R17: library part CMP-1011-00076-1, "1K2 0.063W ±5% 0402 (1005 Metric)"
R18: library part CMP-1011-00076-1, "1K2 0.063W ±5% 0402 (1005 Metric)  SMD"
R19: library part CMP-1011-00897-1, "33k 0.063W ±1% 0402 (1005 Metric)"
R20: library part CMP-1011-00897-1, "10k 0.063W ±1% 0402 (1005 Metric)"
R21: library part CMP-1011-00897-1, "2M74 0.063W ±1% 0402 (1005 Metric)"
R23: library part CMP-1012-00081-1, "2K 0.1W ±5% 0603 (1608 Metric)"
R24: library part CMP-1011-00074-1, "300K 0.063W ±5% 0402 (1005 Metric)"
R25: library part CMP-1011-00074-1, "1K 0.063W ±5% 0402 (1005 Metric)"
R26: library part R0402-22k, "22K *W 1% 0805 (2012 Metric)"
U1: library part bq51051B, "IC WIRELESS PWR RCVR 20QFN"
U2: library part CMP-0343-00055-1, "Boost Voltage Converter with 0.3 to 5.5 V Input and 5 V Output, -40 to 85 degC, 10-Pin SON (DRC), Green (RoHS & no Sb/Br)"
U3: "IC REG LDO 3.3V 0.15A SOT23-5"
U4: library part MC-8B-ATM48-SQ32, "8-bit AVR Microcontroller, 32KB Flash, 1KB EEPROM, 2KB SRAM, 32-pin TQFP, Industrial Grade (-40°C to 85°C)"
U5: library part SEN-MOT-LSM303CTR-12, "3D ACCELEROMETER/MAGNETOMETER"
U6: "IC AUDIO AMP MONO 1.2W 8SOP"
U7: library part CMP-0347-00039-1, "Boost Voltage Converter with 3 to 18 V Input and 3 to 38 V Output, -40 to 85 degC, 6-Pin SON (DRC), Green (RoHS & no Sb/Br)"
U8: "IC BLUETOOTH TRANSCEIVER 32QFN"
U9: library part CMP-0073-00038-1, "One-channel Touch Sensor IC with Reset Timer, -40° to +85° C, 6-pin SOT23"
X1: library part "XTAL SMD 16MHz (3225)", "XTAL SMD 16MHz, 9pF, Mercury"
X2: library part "XTAL_FC-135 32.768k", "EPSON TOYOCOM - FC-135 32.768KHZ ±20PPM,9.0PF - CRYSTAL, SM, WATCH"
X3: library part CSTCE10M0G55-R0, "CER RESONATOR 10.0MHZ SMD"

## Via types
v1: diameter 24, hole 13, Top Layer to Bottom Layer, 107 vias
v2: diameter 24, hole 13, Top Layer to Bottom Layer, tented both sides, 37 vias
v3: diameter 19.68, hole 7.87, Top Layer to Bottom Layer, 7 vias

## Nets (pads, with @x,y where several pads share a name; then routed paths per layer and width w, separated by ;. In a path a pad name is that pad's centre, name@x,y a point inside that pad or via, vN(x,y) a via of type N, cw(c..) or ccw(c..) an arc to the next point about the centre after c; other vN are vias at no path point)
+3.3: C17.2 C18.2 C19.2 C22.2 C25.2 C43.1 C44.2 C49.2 C58.2 FB1.1 JMP1.1 P3.1 P4.3 Q1.1 R8.2 R9.2 R11.2 R13.2 R25.2 U3.5 U4.4 U4.6 U4.18 U5.2 U5.3 U5.9 U5.10 U6.7 U6.8 U8.1 U8.9 U9.5 | length 8341.8
  Top Layer w12: v1(-639.32,-487.32) -640.32,-486.32 -739.32,-486.32 -740.32,-487.32 -740.32,-591.43 -739.32,-592.43 C17.2@-699,-592.43 -662.32,-592.43 -661.35,-593.4 U3.5@-624.24,-593.4 ; U8.9@-375.46,231.9 v1(-466.32,231.9) -471.32,236.9 -471.32,676.68 -418.32,729.68 -266.82,729.68 -244.32,707.18 -244.32,692 ; C49.2@-244.32,458.51 -244.32,692 ; C58.2@-235.37,357.37 -210.1,332.1 U8.1@-210.1,259.46 ; C58.2@-235.37,364.92 C49.2@-235.37,449.57 ; P3.1@-98,854 -98,752 -158,692 ; FB1.1@-83.43,426 -100,442.57 -100,634 -158,692 ; FB1.1@-83.43,431.57 -41.55,473.45 7.44,473.45 84.68,550.68 R13.2@104,550.68 120.68,550.68 140.79,530.58 Q1.1@157.82,530.58 ; P4.3@139,808 181.68,850.68 272.68,850.68 291.68,869.68 291.68,905.68 304,918 371,918 381,908 JMP1.1@381,879 U9.5@381,811.9 ; C25.2@211.71,5.62 211.71,-14.56 201.95,-24.32 C43.1@201.95,-44.38 C44.2@237.46,-44.38 237.46,-65.41 242.36,-70.32 U5.9@242.36,-90.85 ; U5.10@222.68,-90.85 U5.9@242.36,-90.85 ; U5.3@262.05,-149.9 U5.2@242.36,-149.9 ; C18.2@590.73,446.99 606.47,431.24 C19.2@606.47,397.78 ; C18.2@600,462.68 600,463 v1(616.68,479.68) ; U4.4@606.75,322.32 606.75,397.5 C19.2@606.47,397.78 ; C22.2@628.88,-308.36 669.92,-267.32 714.27,-267.32 U6.8@714.28,-266.98 732.58,-266.98 U6.7@757.58,-291.98 768,-281.55 768,-272 999,-41 999,129.37 936.49,191.89 R25.2@934.59,191.89 v1(853,191.89) ; v1(806.16,621.58) R11.2@806.16,500.05 v1(841.48,500.05) ; -244.32,692 -158,692 ; U5.2@242.36,-149.9 U5.9@242.36,-90.85 ; U5.2@242.36,-149.9 242.36,-175.64 239.69,-178.32 R8.2@239.69,-204 R9.2@278.32,-204 278.32,-222.95 294.68,-239.32 388.26,-239.32 512.26,-115.32 512.26,138.68 543.76,170.18 543.76,385.48 556.05,397.78 C19.2@606.47,397.78
  Bottom Layer w12: v1(-639.32,-487.32) -494.32,-487.32 -468,-461 -468,230.21 v1(-466.32,231.9) ; P3.1@-98,854 93,854 ; v1(616.68,479.68) 456.41,479.68 233.41,702.68 189.68,702.68 139,753.37 P4.3@139,808 93,854 ; v1(806.16,621.58) 717.79,621.58 689.68,649.68 689.68,677.18 332.18,1034.68 180.68,1034.68 96.68,950.68 93,854 ; v1(841.48,500.05) 841.48,327.5 853,315.98 v1(853,191.89)